# EAGLE board PCB-ARD-MMBOS (EAGLE 7.2.0)
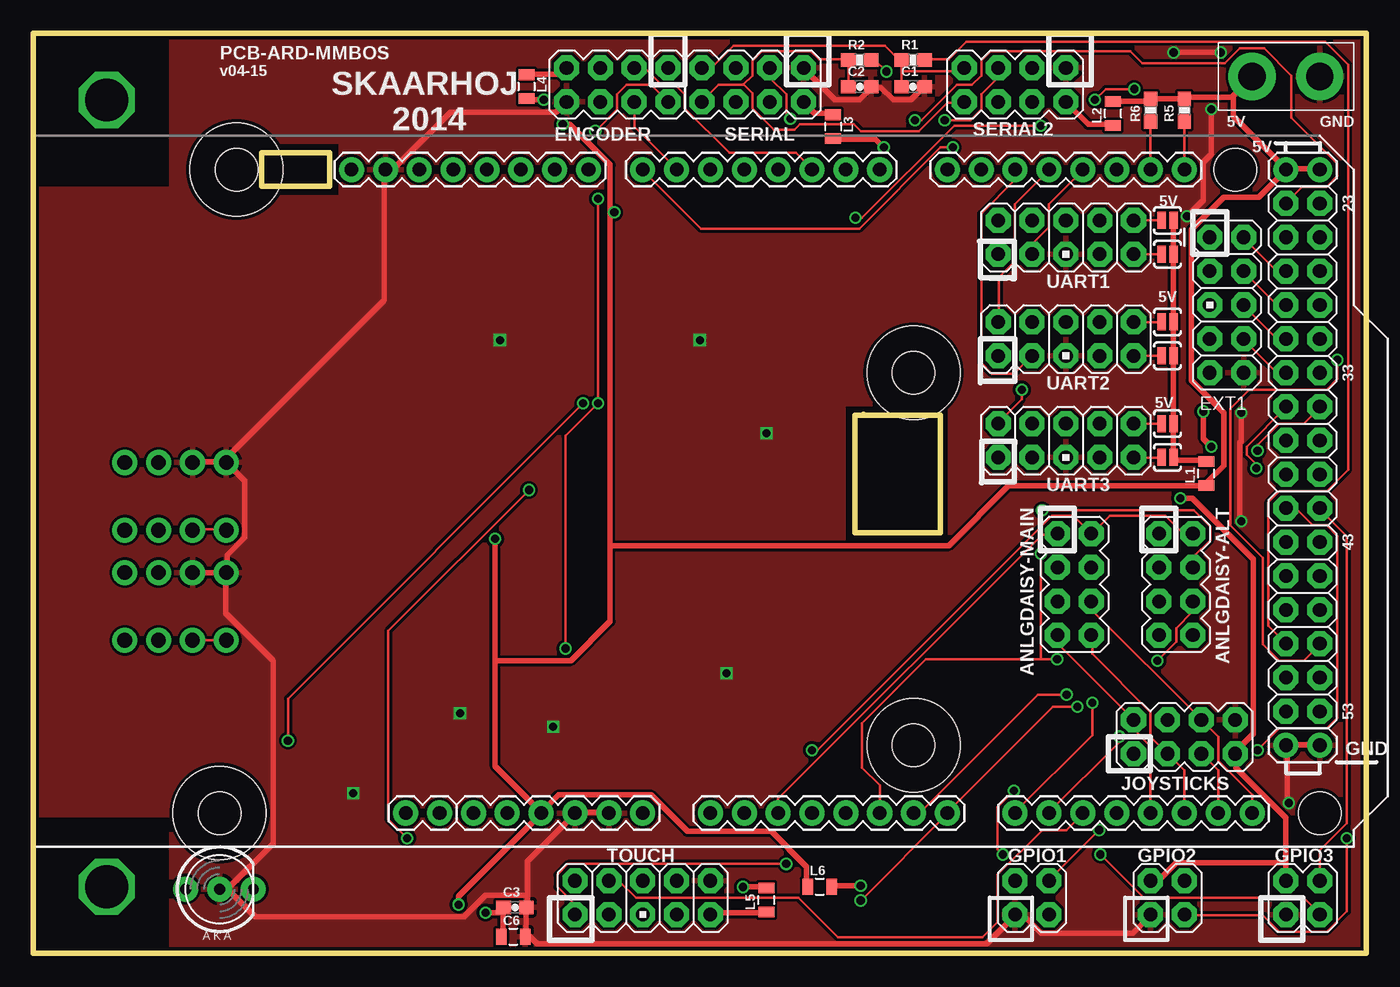
[diagram p0: board, top side]
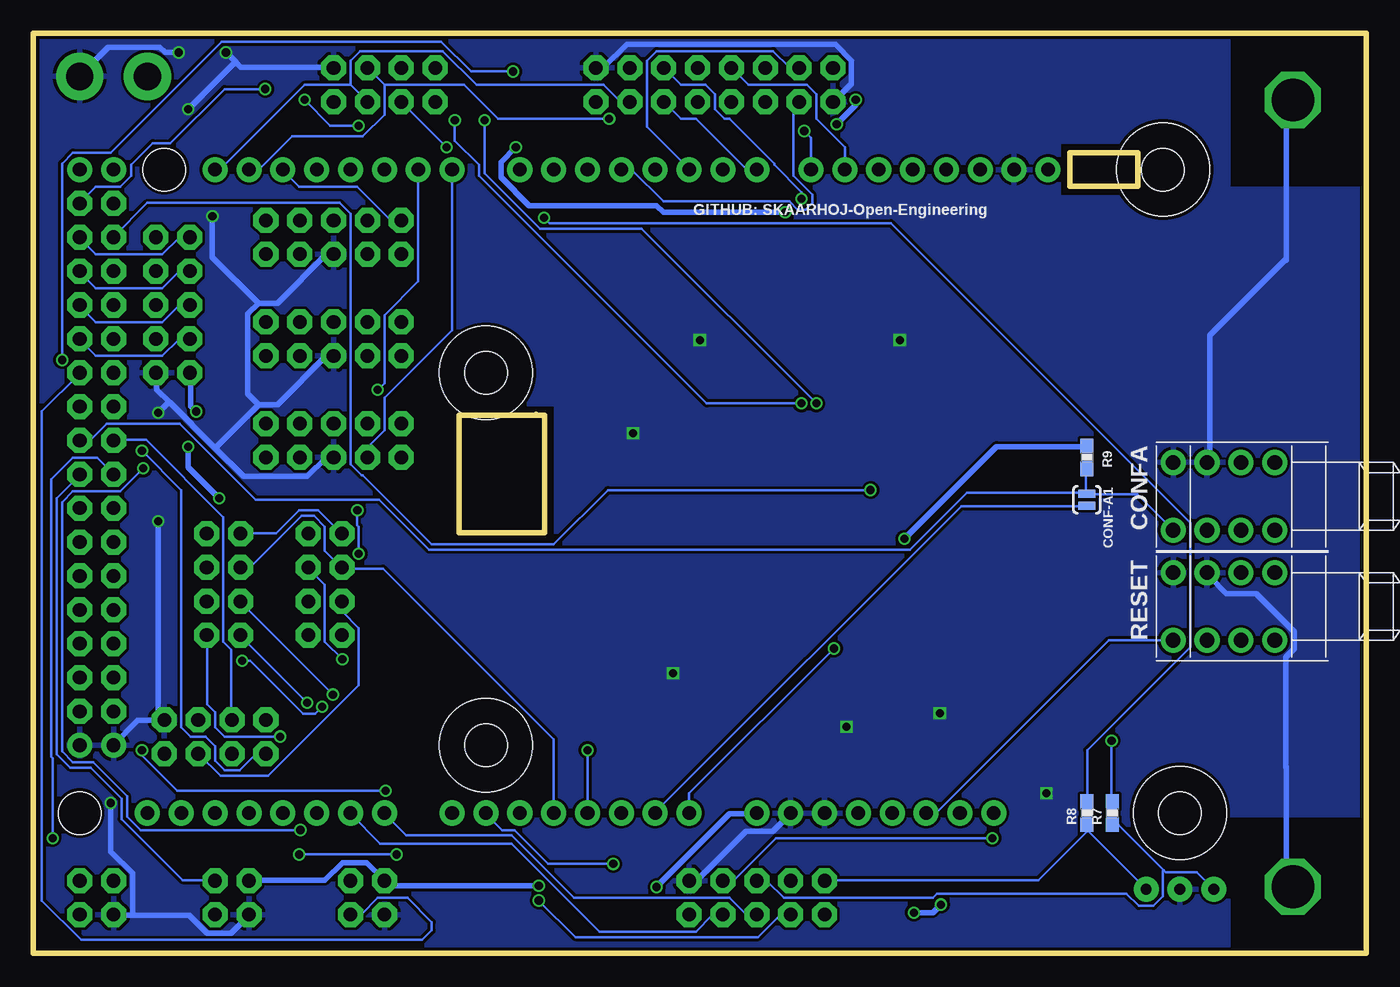
[diagram p1: board, bottom side, seen from below]

Size 100 x 69 mm. Coordinates in mm from the lower left corner, seen from the top.
Outline: 0,0 0,69 100,69 100,0 0,0
Copper layers (1*16): Top 0.035mm / dielectric 1.5mm / Bottom 0.035mm
Design rules "Fusion_eagle_rule_v1.1": minimum track width 6mil, minimum drill 12mil, track to track 6mil, track to pad 6mil, pad to pad 6mil, via to via 6mil, smd to smd 0mil, copper to edge 10mil, drill to drill 10mil, minimum pad ring 10mil, minimum via ring 6mil, stop-mask expansion 2mil, vias tented up to drill 100mil, thermal gap 10mil
Net classes: 0 default: width 0.203 mm, drill 0.61 mm, clearance 0.203 mm; 1 Power: width 0.406 mm, drill 0.61 mm, clearance 0.203 mm; 2 RELAY LINES: width 0.305 mm, clearance 0.203 mm; 3 INput lines: clearance 0.203 mm
Holes 7 mm at 13.97,10.53 15.24,58.78 66.04,43.55 66.04,15.61
tRestrict: area 0,0 to 10.2,10.2; area 0,57.5 to 10.2,68.9; area 61,30.8 to 68.6,41; area 16.5,56.9 to 22.9,60.7
bRestrict: area 0,57.5 to 10.2,68.9; area 0,0 to 10.2,10.2; area 61,30.8 to 68.6,41; area 16.5,56.9 to 22.9,60.7
Milling: 10 lines

## Footprints (pad centres in the part's own frame; a part is rotated, then mirrored left to right if it is on the bottom)
2X4 = drill 1.016 pad 1.88 octagon: 1 -3.81,-1.27; 2 -3.81,1.27; 3 -1.27,-1.27; 4 -1.27,1.27; 5 1.27,-1.27; 6 1.27,1.27; 7 3.81,-1.27; 8 3.81,1.27
0603-CAP = smd 1.1 x 1: 1 -0.85,0; 2 0.85,0
0805 = smd 0.8 x 1.2: 1 -0.9,0; 2 0.9,0
PUSHBUTTON = drill 1.1 pad 1.88: 1 2.54,2.54; 2 2.54,-2.54; 3 -2.54,2.54; 4 -2.54,-2.54
SJ_2S-NO = smd 0.635 x 1.27: 1 -0.45,0; 2 0.45,0
AVR_ICSP = drill 1.016 pad 1.88 octagon: 1 -1.27,5.08; 2 1.27,5.08; 3 -1.27,2.54; 4 1.27,2.54; 5 -1.27,0; 6 1.27,0; 7 -1.27,-2.54; 8 1.27,-2.54; 9 -1.27,-5.08; 10 1.27,-5.08
2X2 = drill 1.016 pad 1.88 octagon: 1 -3.81,-1.27; 2 -3.81,1.27; 3 -1.27,-1.27; 4 -1.27,1.27
1X02 = drill 1.016 pad 1.88: 1 0,0; 2 2.54,0
1X02_XTRA_BIG = drill 2.057 pad 3.556: 1 -2.54,0; 2 2.54,0
0603-RES = smd 1.1 x 1: 1 -0.85,0; 2 0.85,0
ARDUINO_MEGA = drill 1.016 pad 1.88: 0 63.5,50.8; 1 60.96,50.8; 2 58.42,50.8; 3 55.88,50.8; 3.3V 35.56,2.54; 4 53.34,50.8; 5 50.8,50.8; 5V@0 38.1,2.54; 5V@1 93.98,50.8; 5V@2 96.52,50.8; 6 48.26,50.8; 7 45.72,50.8; 8 41.656,50.8; 9 39.116,50.8; 10 36.576,50.8; 11 34.036,50.8; 12 31.496,50.8; 13 28.956,50.8; 14 68.58,50.8; 15 71.12,50.8; 16 73.66,50.8; 17 76.2,50.8; 18 78.74,50.8; 19 81.28,50.8; 20 83.82,50.8; 21 86.36,50.8; A0 50.8,2.54; A1 53.34,2.54; A2 55.88,2.54; A3 58.42,2.54; A4 60.96,2.54; A5 63.5,2.54; A6 66.04,2.54; A7 68.58,2.54; A8 73.66,2.54; A9 76.2,2.54; A10 78.74,2.54; A11 81.28,2.54; A12 83.82,2.54; A13 86.36,2.54; A14 88.9,2.54; A15 91.44,2.54; AREF 23.876,50.8; GND@0 40.64,2.54; GND@1 43.18,2.54; GND@2 93.98,7.62; GND@3 96.52,7.62; GND@4 26.416,50.8; RESET 33.02,2.54; VIN 45.72,2.54 | drill 1.016 pad 1.88 octagon: 22 93.98,48.26; 23 96.52,48.26; 24 93.98,45.72; 25 96.52,45.72; 26 93.98,43.18; 27 96.52,43.18; 28 93.98,40.64; 29 96.52,40.64; 30 93.98,38.1; 31 96.52,38.1; 32 93.98,35.56; 33 96.52,35.56; 34 93.98,33.02; 35 96.52,33.02; 36 93.98,30.48; 37 96.52,30.48; 38 93.98,27.94; 39 96.52,27.94; 40 93.98,25.4; 41 96.52,25.4; 42 93.98,22.86; 43 96.52,22.86; 44 93.98,20.32; 45 96.52,20.32; 46 93.98,17.78; 47 96.52,17.78; 48 93.98,15.24; 49 96.52,15.24; 50 93.98,12.7; 51 96.52,12.7; 52 93.98,10.16; 53 96.52,10.16 | hole 3.2: 15.24,50.8; 13.97,2.54; 66.04,35.56; 66.04,7.62; 90.17,50.8; 96.52,2.54
3.2MMPAD = drill 3.2 octagon: P$1 0,0
LED5MM-BICOLOR = drill 0.813 pad 1.88: A2 2.54,0; A3 -2.54,0; K1 0,0

## Placement (x,y rotation side)
ANLGDAISY-ALT  M04X2  [2X4]  85.72,27.67 270 top
ANLGDAISY-MAIN  M04X2  [2X4]  78.11,27.67 270 top
C1  220pF?  [0603-CAP]  66,65 0 top
C2  220pF?  [0603-CAP]  62,65 0 top
C3  100nF  [0603-CAP]  36.13,3.44 0 top
C6  22uF  [0805]  36,1.25 0 top
CONF  [PUSHBUTTON]  9.4,34.27 90 bottom
CONF-A1  SOLDERJUMPERNO  [SJ_2S-NO]  20.95,34.02 270 bottom
CONFA  [PUSHBUTTON]  11.94,34.27 90 bottom
ENCODER  M04X2  [2X4]  43.81,65.14 180 top
EXT1  M05X2PTH  [AVR_ICSP]  89.53,48.62 0 top
GPIO1  M02X2  [2X2]  77.47,4.17 0 top
GPIO2  M02X2  [2X2]  87.63,4.17 0 top
GPIO3  M02X2  [2X2]  97.79,4.17 0 top
JOYSTICKS  M04X2  [2X4]  86.36,16.24 0 top
JP1  [1X02]  27.94,10.53 0 top
JP8  [1X02_XTRA_BIG]  93.98,65.77 180 top
L1  [0805]  88,36 90 top
L2  [0805]  81,63 90 top
L3  [0805]  60,62 270 top
L4  [0805]  37,65 270 top
L5  [0805]  55,4 90 top
L6  [0805]  59,5 0 top
R1  ?  [0603-RES]  66,67 0 top
R2  ?  [0603-RES]  62,67 0 top
R5  1K5  [0603-RES]  86.36,63.23 90 top
R6  1K5  [0603-RES]  83.82,63.23 90 top
R7  270R  [0603-RES]  19.05,10.53 90 bottom
R8  270R  [0603-RES]  20.95,10.53 90 bottom
R9  10K  [0603-RES]  20.95,37.2 270 bottom
RESET  [PUSHBUTTON]  11.94,26.02 90 bottom
RESETA  [PUSHBUTTON]  9.4,26.02 90 bottom
SERIAL  M04X2  [2X4]  53.98,65.14 180 top
SERIAL2  M04X2  [2X4]  73.66,65.14 180 top
SJ1  SOLDERJUMPERNO  [SJ_2S-NO]  85.09,54.98 0 top
SJ2  SOLDERJUMPERNO  [SJ_2S-NO]  85.09,52.44 180 top
SJ3  SOLDERJUMPERNO  [SJ_2S-NO]  85.09,44.81 180 top
SJ4  SOLDERJUMPERNO  [SJ_2S-NO]  85.09,47.35 0 top
SJ5  SOLDERJUMPERNO  [SJ_2S-NO]  85.09,39.73 0 top
SJ6  SOLDERJUMPERNO  [SJ_2S-NO]  85.09,37.2 180 top
TOUCH  M05X2PTH  [AVR_ICSP]  45.72,4.17 90 top
U1  ARDUINO-MEGAFULL  [ARDUINO_MEGA]  0,7.99 0 top
U$1  GNDPAD  [3.2MMPAD]  5.5,64 0 top
U$15  LEDBICOLOR-AKA  [LED5MM-BICOLOR]  13.97,4.81 0 top
U$20  GNDPAD  [3.2MMPAD]  5.5,5 0 top
UART1  M05X2PTH  [AVR_ICSP]  77.47,53.7 90 top
UART2  M05X2PTH  [AVR_ICSP]  77.47,46.09 90 top
UART3  M05X2PTH  [AVR_ICSP]  77.47,38.47 90 top

## Library data of the parts
ANLGDAISY-ALT ANLGDAISY-MAIN C1-C3 C6 CONF-A1 ENCODER EXT1 JOYSTICKS JP1 JP8 L1-L6 R1 R2 R5-R9 SERIAL SERIAL2 SJ1-SJ6 TOUCH UART1-UART3 = SparkFun
CONF CONFA GPIO1-GPIO3 RESET RESETA U1 U$1 U$15 U$20 = SKAARHOJ

## Nets
5V [Power]: C3.1 C6.1 JP8.2 L1.1 L2.2 L3.2 L4.2 L6.1 R5.2 R6.2 R9.1 U1.5V@0 U1.5V@1 U1.5V@2
A0: SERIAL2.5 SERIAL.5 U1.A0
A1: CONF-A1.2 U1.A1
A2: ANLGDAISY-ALT.1 ANLGDAISY-MAIN.1 U1.A2
A3: ANLGDAISY-ALT.2 ANLGDAISY-MAIN.2 U1.A3
A4: ANLGDAISY-ALT.3 ANLGDAISY-MAIN.3 U1.A4
A5: ANLGDAISY-ALT.4 ANLGDAISY-MAIN.4 U1.A5
A6: ANLGDAISY-ALT.5 TOUCH.1 U1.A6
A7: ANLGDAISY-ALT.6 TOUCH.3 U1.A7
A8: ANLGDAISY-ALT.7 TOUCH.5 U1.A8
A9: ANLGDAISY-ALT.8 TOUCH.7 U1.A9
A10: TOUCH.4 U1.A10
A11: U1.A11
A12: ANLGDAISY-MAIN.7 JOYSTICKS.2 U1.A12
A13: ANLGDAISY-MAIN.8 JOYSTICKS.3 U1.A13
A14: ANLGDAISY-MAIN.5 JOYSTICKS.5 U1.A14
A15: ANLGDAISY-MAIN.6 JOYSTICKS.6 U1.A15
D2: ENCODER.3 U1.2
D3: ENCODER.6 U1.3
D4: U1.4
D5: ENCODER.5 U1.5
D6: ENCODER.4 U1.6
D7: SERIAL2.6 SERIAL.6 U1.7
D8: ENCODER.2 U1.8
D9: ENCODER.1 U1.9
D22: R7.2 U1.22
D23: R8.2 U1.23
D24: TOUCH.8 U1.24
D37: CONF-A1.1 CONF.3 CONFA.3 R9.2 U1.37
EXT1: EXT1.1 U1.25
EXT2: EXT1.2 U1.26
EXT3: EXT1.3 U1.27
EXT4: EXT1.4 U1.28
EXT5: EXT1.5 U1.29
EXT6: EXT1.6 U1.30
EXT7: EXT1.7 U1.31
EXT8: EXT1.8 U1.32
GND [Power]: C1.2 C2.2 C3.2 C6.2 CONF.1 CONFA.1 ENCODER.8 EXT1.10 GPIO1.1 GPIO2.1 GPIO3.1 JOYSTICKS.8 JP8.1 RESET.1 RESETA.1 SERIAL2.1 SERIAL.1 TOUCH.10 U1.GND@0 U1.GND@1 U1.GND@2 U1.GND@3 U1.GND@4 U$1.P$1 U$15.K1 U$20.P$1 UART1.5 UART2.5 UART3.5
GPIO1-1: GPIO1.3 U1.33
GPIO1-2: GPIO1.4 U1.34
GPIO2-1: GPIO2.3 U1.38
GPIO2-2: GPIO2.4 U1.39
GPIO3-1: GPIO3.3 U1.40
GPIO3-2: GPIO3.4 U1.41
I2C_SCL: R5.1 SERIAL2.4 SERIAL.4 U1.21
I2C_SDA: R6.1 SERIAL2.3 SERIAL.3 U1.20
MOSI: C2.1 R2.1 SERIAL2.8 SERIAL.8
N$1 [Power]: L2.1 SERIAL2.2
N$2 [Power]: L3.1 SERIAL.2
N$3: SJ6.2 UART3.9
N$4 [Power]: ENCODER.7 L4.1
N$5 [Power]: L5.1 TOUCH.9
N$6: SJ3.2 UART2.9
N$7 [Power]: EXT1.9 GPIO1.2 GPIO2.2 GPIO3.2 JOYSTICKS.7 L6.2
N$8 [Power]: L1.2 SJ1.2 SJ2.1 SJ3.1 SJ4.2 SJ5.2 SJ6.1
N$9: SJ2.2 UART1.9
N$10: SJ1.1 UART1.10
N$11: R1.2 U1.48
N$12: SJ4.1 UART2.10
N$13: SJ5.1 UART3.10
N$14: R2.2 U1.49
N$17: R8.1 TOUCH.2 U$15.A2
N$18: U1.53
N$19: U1.52
N$20: U1.51
N$21: U1.50
N$22: R7.1 TOUCH.6 U$15.A3
N$24: U1.47
N$25: U1.46
N$26: U1.45
N$27: U1.44
N$28: U1.43
N$29: U1.42
RESET: RESET.3 RESETA.3 U1.RESET
RXD1: U1.19 UART1.2
RXD2: U1.17 UART2.2
RXD3: U1.15 UART3.2
SCLK: C1.1 R1.1 SERIAL2.7 SERIAL.7
SW1: JOYSTICKS.1 U1.35
SW2: JOYSTICKS.4 U1.36
TXD1: U1.18 UART1.3
TXD2: U1.16 UART2.3
TXD3: U1.14 UART3.3
VIN [Power]: L5.2 U1.VIN

## Tracks (layer width: path | path; a pad name or v marks a point on that pad's centre or on a via)
5V  (via drill 0.61)
  Top 0.406: L2.2 81.08,63.91 83.72,63.91 R6.2 83.82,64.11 86.36,64.11 R5.2 86.46,64.21 89.92,64.21 | 89.92,64.21 91.44,65.73 JP8.2 | U1.5V@1 93.98,58.73 91.95,56.69 89.31,56.69 86.87,54.25 86.87,42.98 89.31,40.54 89.31,36.58 88.09,35.36 88.09,35.15 L1.1 87.88,35.05 73.15,35.05 68.68,30.58 43.28,30.58 | U1.5V@2 96.52,58.83 94.08,58.83 U1.5V@1 | 89.92,64.21 90.02,64.11 90.02,62.79 93.88,58.93 U1.5V@1 | C6.1 35.15,1.32 35.26,1.42 35.26,3.35 C3.1 35.15,3.05 v33.93,3.05 | 34.65,21.95 34.65,14.02 38.1,10.57 U1.5V@0 | 34.65,21.95 v34.65,31.09 | L6.1 58.01,5.08 58.01,6.5 55.37,9.14 49.07,9.14 46.33,11.89 39.42,11.89 38.2,10.67 U1.5V@0 | v38.3,64.01 37.08,64.01 L4.2 | v39.73,62.18 40.23,62.18 43.28,59.13 43.28,55.58 | 43.28,30.58 43.28,24.89 40.34,21.95 34.65,21.95 | 43.28,30.58 43.28,55.58 | v63.8,60.45 63.2,61.06 60.05,61.06 L3.2 | 43.28,55.58 v43.59,55.58 | v31.9,3.66 31.9,4.27 38,10.36 U1.5V@0
  Bottom 0.406: v34.65,31.09 27.74,38 21.03,38 R9.1 | v38.3,64.01 38.3,63.6 v39.73,62.18 | v63.8,60.45 64.92,59.33 64.92,58.22 62.79,56.08 53.24,56.08 52.73,55.58 v43.59,55.58 | v33.93,3.05 32.51,3.05 v31.9,3.66
A0  (via drill 0.61)
  Top 0.203: v39.93,22.86 39.93,38.81 v42.37,41.25 v42.37,56.59 | v68.38,62.48 70.31,62.48 71.12,63.3 71.12,64.41 72.34,65.63 72.34,66.34 SERIAL2.5
  Bottom 0.203: U1.A0 50.8,11.99 v39.93,22.86 | v42.37,56.59 42.37,57.1 44.4,59.13 44.4,59.23 47.75,62.59 48.16,62.59 48.87,63.3 48.87,64.41 49.58,65.13 51.41,65.13 52.63,66.34 SERIAL.5 | v68.38,62.48 68.38,60.96 66.55,59.13 66.55,58.32 49.48,41.25 v42.37,41.25
A1
  Bottom 0.203: CONF-A1.2 21.03,33.53 30.38,33.53 53.34,10.57 U1.A1
A2
  Top 0.203: U1.A2 55.88,11.58 75.69,31.39 76.81,31.39 ANLGDAISY-MAIN.1
  Bottom 0.203: ANLGDAISY-ALT.1 84.43,31.5 81.79,31.5 80.06,33.22 78.64,33.22 76.91,31.5 ANLGDAISY-MAIN.1
A3  (via drill 0.61)
  Top 0.203: v58.42,15.24 58.83,15.24 76.4,32.82 78.03,32.82 79.35,31.5 ANLGDAISY-MAIN.2 79.45,31.5 80.77,32.82 84.94,32.82 86.26,31.5 86.97,31.5 ANLGDAISY-ALT.2
  Bottom 0.203: v58.42,15.24 U1.A3
A4
  Bottom 0.203: U1.A4 60.96,16.05 73.76,28.85 76.81,28.85 ANLGDAISY-MAIN.3 76.91,28.96 78.13,30.18 78.13,32 78.94,32.82 79.86,32.82 83.72,28.96 84.43,28.96 ANLGDAISY-ALT.3
A5  (via drill 0.61)
  Top 0.203: U1.A5 63.5,12.6 62.18,13.92 62.18,17.27 66.95,22.05 75.59,22.05 | v76.81,22.05 75.59,22.05 | v75.69,33.22 87.07,33.22 88.29,32 88.29,30.99 87.07,29.77 87.07,28.96 ANLGDAISY-ALT.4 | 75.59,22.05 v75.59,29.97
  Bottom 0.203: v76.81,22.05 78.13,23.37 78.13,27.64 79.35,28.85 ANLGDAISY-MAIN.4 | v75.69,33.22 75.69,32.11 75.59,32 v75.59,29.97
A6  (via drill 0.61)
  Top 0.203: TOUCH.1 40.64,3.66 39.32,4.98 39.32,5.89 40.13,6.71 v56.49,6.71 | v77.52,19.41 75.39,19.41 66.55,10.57 66.04,10.57 U1.A6
  Bottom 0.203: v56.49,6.71 61.37,6.71 63.91,9.25 64.82,9.25 66.04,10.46 U1.A6 | v77.52,19.41 84.43,26.31 ANLGDAISY-ALT.5
A7  (via drill 0.61)
  Top 0.203: v62.08,3.96 68.58,10.46 U1.A7 68.58,10.57 76.5,18.49 v78.33,18.49 | v84.33,21.95 85.75,23.37 85.75,24.38 86.97,25.6 86.97,26.31 ANLGDAISY-ALT.6
  Bottom 0.203: v62.08,3.96 59.33,1.22 45.62,1.22 43.99,2.85 43.18,2.85 TOUCH.3 | v84.33,21.95 83.72,21.95 79.76,17.98 78.84,17.98 v78.33,18.49
A8  (via drill 0.61)
  Top 0.203: v79.45,18.8 79.45,16.36 73.66,10.57 U1.A8
  Bottom 0.203: TOUCH.5 45.72,2.95 46.53,2.95 47.75,4.17 59.44,4.17 64.11,8.84 72.03,8.84 73.66,10.46 U1.A8 | v79.45,18.8 84.43,23.77 ANLGDAISY-ALT.7
A9  (via drill 0.61)
  Top 0.203: v81.48,16.26 81.48,15.85 76.2,10.57 U1.A9
  Bottom 0.203: TOUCH.7 48.26,2.85 49.07,2.85 50.29,1.63 57.51,1.63 64.11,8.23 73.97,8.23 76.2,10.46 U1.A9 | v81.48,16.26 85.65,16.26 86.36,16.97 86.36,18.09 86.97,18.69 86.97,23.77 ANLGDAISY-ALT.8
A10
  Top 0.203: TOUCH.4 43.18,5.38 43.99,5.38 45.21,4.17 57.4,4.17 60.35,1.22 71.22,1.22 72.34,2.34 72.34,5.89 75.69,9.25 77.52,9.25 78.74,10.46 U1.A10
A12
  Top 0.203: U1.A12 83.82,15.54 82.6,16.76 82.6,17.48 JOYSTICKS.2 82.5,17.58 76.91,23.16 76.91,23.77 ANLGDAISY-MAIN.7
A13
  Top 0.203: U1.A13 86.36,13.72 85.14,14.94 JOYSTICKS.3 85.04,15.04 83.82,16.26 83.82,18.09 79.45,22.45 79.45,23.77 ANLGDAISY-MAIN.8
A14
  Top 0.203: U1.A14 88.9,13.72 87.68,14.94 JOYSTICKS.5
  Bottom 0.203: ANLGDAISY-MAIN.5 76.81,26.31 76.81,25.6 75.59,24.38 75.59,20.12 82.4,13.31 85.95,13.31 87.58,14.94 JOYSTICKS.5
A15
  Top 0.203: U1.A15 91.44,11.89 88.9,14.43 88.9,16.26 87.68,17.48 JOYSTICKS.6 87.58,17.58 79.45,25.7 79.45,26.31 ANLGDAISY-MAIN.6
D2
  Top 0.203: ENCODER.3 45.11,66.34 45.92,66.34 47.14,65.13 48.16,65.13 48.87,64.41 48.87,63.4 52.22,60.05 57.2,60.05 58.42,58.83 U1.2
D3
  Bottom 0.203: U1.3 55.88,58.73 55.07,58.73 52.73,56.39 43.28,56.39 42.67,55.78 42.06,55.78 41.55,56.29 41.55,56.9 42.98,58.32 42.98,63.4 42.57,63.8 ENCODER.6
D5
  Bottom 0.203: ENCODER.5 42.57,66.45 43.28,66.45 44.5,67.67 53.24,67.67 53.95,66.95 53.95,61.98 50.8,58.83 U1.5
D6
  Top 0.203: ENCODER.4 45.11,63.8 45.11,61.98 48.26,58.83 U1.6
D7  (via drill 0.61)
  Top 0.203: v68.99,60.45 68.07,60.45 61.98,54.36 50.09,54.36 45.72,58.73 U1.7
  Bottom 0.203: U1.7 45.72,58.83 46.53,58.83 50.29,62.59 51.41,62.59 52.63,63.8 SERIAL.6 | v68.99,60.45 72.34,63.8 SERIAL2.6
D8  (via drill 0.61)
  Top 0.203: v42.16,61.67 43.79,63.3 43.79,64.41 44.5,65.13 46.33,65.13 47.55,63.91 ENCODER.2
  Bottom 0.203: U1.8 41.66,61.16 v42.16,61.67
D9
  Bottom 0.203: U1.9 39.12,60.45 41.25,62.59 41.25,64.41 41.96,65.13 46.33,65.13 47.55,66.34 ENCODER.1
D22  (via drill 0.61)
  Top 0.203: v19.1,15.95 19.1,19.1 v41.25,41.25 | v66.14,62.48 66.65,62.48 69.29,65.13 70.41,65.13 71.12,65.84 71.12,66.95 71.83,67.67 82.3,67.67 83.21,66.75 89.41,66.75 90.53,67.87 92.35,67.87 94.39,65.84 94.39,62.69 97.84,59.23 97.84,58.32 97.03,57.51 95.2,57.51 93.98,56.29 U1.22
  Bottom 0.203: v19.1,15.95 19.1,11.38 R7.2 | v41.25,41.25 54.36,54.36 61.98,54.36 66.14,58.52 v66.14,62.48
D23  (via drill 0.61)
  Top 0.203: v61.67,55.17 62.18,55.17 69.09,62.08 v75.59,62.08 | v79.65,64.01 80.47,64.82 v82.6,64.82
  Bottom 0.203: v61.67,55.17 61.27,54.76 35.66,54.76 13.21,32.31 13.21,22.96 20.93,15.24 20.93,11.38 R8.2 | v75.59,62.08 77.72,62.08 v79.65,64.01 | v82.6,64.82 85.65,64.82 89.71,60.76 91.03,60.76 92.66,59.13 92.66,58.32 93.47,57.51 95.3,57.51 96.52,56.29 U1.23
D24  (via drill 0.61)
  Top 0.203: v28.04,8.64 26.62,10.06 26.62,24.18 v37.19,34.75
  Bottom 0.203: v28.04,8.64 44.3,8.64 47.45,5.49 48.26,5.49 TOUCH.8 | v37.19,34.75 56.9,34.75 60.96,30.68 70.1,30.68 75.29,35.87 75.39,35.87 76.2,36.68 76.2,55.47 77.01,56.29 91.44,56.29 93.98,53.75 U1.24
D37
  Top 0.203: CONF.3 11.99,31.8 14.43,31.8 CONFA.3
  Bottom 0.203: R9.2 21.03,36.27 21.03,34.54 CONF-A1.1 | CONF-A1.1 20.93,34.44 17.17,34.44 14.53,31.8 CONFA.3 | U1.37 96.52,38.51 95.71,38.51 94.49,39.73 89,39.73 83.31,34.04 74.07,34.04 70.31,30.28 34.24,30.28 29.97,34.54 21.13,34.54 CONF-A1.1
EXT1
  Bottom 0.203: EXT1.1 88.29,53.65 89.1,53.65 90.32,52.43 95.3,52.43 96.52,53.65 U1.25
EXT2
  Top 0.203: U1.26 93.98,51.21 93.27,51.21 90.83,53.65 EXT1.2
EXT3
  Bottom 0.203: EXT1.3 88.29,51.1 89.1,51.1 90.32,49.89 95.3,49.89 96.52,51.1 U1.27
EXT4
  Top 0.203: U1.28 93.98,48.67 93.27,48.67 90.83,51.1 EXT1.4
EXT5
  Bottom 0.203: EXT1.5 88.29,48.56 89.1,48.56 90.32,47.35 95.3,47.35 96.52,48.56 U1.29
EXT6
  Top 0.203: U1.30 93.98,46.13 93.27,46.13 90.83,48.56 EXT1.6
EXT7
  Bottom 0.203: EXT1.7 88.29,46.02 89.1,46.02 90.32,44.81 95.3,44.81 96.52,46.02 U1.31
EXT8
  Top 0.203: U1.32 93.98,43.59 93.27,43.59 90.83,46.02 EXT1.8
GND  (via drill 0.6, 0.61)
  Top 0.406: v89.1,67.56 v85.55,67.56 | v88.39,63.3 88.39,59.94 87.78,59.33 87.78,56.49 v86.56,55.27 | C1.2 66.75,64.92 65.84,64.01 64.52,64.01 63.6,64.92 62.89,64.92 C2.2 62.79,64.82 61.98,64.01 60.15,64.01 57.81,66.34 SERIAL.1 | ENCODER.8 39.93,63.8 39.22,63.09 31.29,63.09 27.03,58.83 26.42,58.83 U1.GND@4 26.31,58.62 26.31,48.97 14.43,37.08 CONFA.1 | U1.GND@3 96.52,15.65 93.98,15.65 U1.GND@2 94.08,15.44 94.08,11.38 v94.18,11.28 | GPIO2.1 83.82,2.85 82.5,1.52 75.59,1.52 74.27,2.85 73.66,2.85 GPIO1.1 73.56,2.74 71.53,0.71 37.8,0.71 37.19,1.32 C6.2 36.98,1.32 36.98,3.35 C3.2 37.08,3.56 37.08,4.37 | RESETA.1 11.99,28.55 14.43,28.55 RESET.1 | CONF.1 11.99,36.88 14.43,36.88 CONFA.1 | RESET.1 14.53,28.75 14.53,29.87 15.85,31.19 15.85,35.46 14.63,36.68 CONFA.1 | 37.08,4.37 37.08,6.91 40.64,10.46 U1.GND@0 40.74,10.57 43.18,10.57 U1.GND@1 | 37.08,4.37 33.93,4.37 32.31,2.74 16.66,2.74 14.63,4.78 14.02,4.78 U$15.K1 14.63,4.88 17.98,8.23 17.98,21.95 14.43,25.5 14.43,28.35 RESET.1 | v90.63,40.54 90.63,38.41 90.53,38.3 90.53,32.51 v90.63,32.41
  Bottom 0.406: v85.55,67.56 84.84,66.85 | 84.84,66.85 84.43,66.45 77.52,66.45 SERIAL2.1 | v89.1,67.56 90.12,67.56 90.53,67.97 94.39,67.97 96.52,65.84 JP8.1 | 89.81,41.35 90.73,42.27 90.73,43.48 EXT1.10 | 89.81,41.35 86.36,37.9 | 86.36,37.9 84.23,35.76 79.45,35.76 78.03,37.19 77.52,37.19 UART3.5 | 83.11,41.15 81.69,41.15 78.03,44.81 77.52,44.81 UART2.5 | 86.36,37.9 83.11,41.15 | 83.11,48.77 81.69,48.77 78.03,52.43 77.52,52.43 UART1.5 | 83.11,48.77 83.92,47.95 83.92,41.96 83.11,41.15 | v88.39,63.3 84.84,66.85 | v86.56,55.27 86.56,52.22 83.11,48.77 | SERIAL.1 57.71,66.45 57.2,66.45 55.47,68.17 39.83,68.17 38.61,66.95 38.61,65.23 39.93,63.91 ENCODER.8 | U1.GND@2 93.98,15.65 92.15,17.48 90.22,17.48 JOYSTICKS.8 90.63,17.58 v90.63,32.41 | 92.56,2.85 88.29,2.85 86.97,1.52 85.14,1.52 83.82,2.85 GPIO2.1 | 92.56,2.85 93.98,2.85 GPIO3.1 | v94.18,11.28 94.18,7.62 92.56,5.99 92.56,2.85 | TOUCH.10 50.8,5.49 50.19,5.49 46.53,9.14 44.5,9.14 43.18,10.46 U1.GND@1 | v90.63,40.54 89.81,41.35 | U$1.P$1 6,64 6,52.07 | 6,52.07 6,52 | U$20.P$1 6,5 6,13.97 | 6,13.97 6,14 | 6,13.97 6.03,13.97 6.03,22.23 5.4,22.86 5.4,24.13 8.26,26.99 10.48,26.99 11.75,28.26 RESETA.1 | CONF.1 11.75,36.83 11.75,46.35 6.03,52.07 6,52.07
  other vias: 35,46 50,46 55,39 39,17 32,18 24,12 52,21
  pour Top: 0,0 102,0 102,69 0,69
  pour Bottom: 0,0 102,0 102,69 0,69
GPIO1-1
  Bottom 0.203: GPIO1.3 76.2,2.95 75.39,2.95 74.17,4.17 71.93,4.17 70.1,2.34 70.1,1.73 70.81,1.02 96.42,1.02 99.36,3.96 99.36,40.64 96.52,43.48 U1.33
GPIO1-2  (via drill 0.61)
  Top 0.203: v79.96,9.25 76.2,5.49 GPIO1.4 | v91.75,36.37 91.75,36.68 91.03,37.39 91.03,38 93.98,40.95 U1.34
  Bottom 0.203: v79.96,9.25 91.95,9.25 92.96,10.26 92.96,11.79 95.5,14.33 97.03,14.33 97.84,15.14 97.84,33.83 97.03,34.65 93.47,34.65 v91.75,36.37
GPIO2-1  (via drill 0.61)
  Top 0.203: v98.55,8.64 98.55,3.15 97.03,1.63 93.47,1.63 92.25,2.85 86.36,2.85 GPIO2.3
  Bottom 0.203: v98.55,8.64 98.55,14.63 98.65,14.73 98.65,35.56 97.03,37.19 95.2,37.19 93.98,35.97 U1.38
GPIO2-2
  Bottom 0.203: GPIO2.4 86.36,5.49 88.8,5.49 93.37,10.06 93.37,11.58 95.71,13.92 97.23,13.92 98.25,14.94 98.25,34.14 96.52,35.87 U1.39
GPIO3-1  (via drill 0.61)
  Top 0.203: v91.85,15.24 93.47,16.87 97.03,16.87 97.84,17.68 97.84,31.29 97.03,32.11 96.01,32.11 94.79,33.33 93.98,33.33 U1.40 | v73.56,12.19 72.34,10.97 72.34,7.82 v72.75,7.42 | v80.06,7.42 83.31,4.17 95.3,4.17 96.52,2.95 GPIO3.3
  Bottom 0.203: v91.85,15.24 91.85,14.83 89.2,12.19 v73.56,12.19 | v80.06,7.42 v72.75,7.42
GPIO3-2
  Top 0.203: GPIO3.4 96.52,7.72 98.55,9.75 98.55,31.29 96.52,33.33 U1.41
I2C_SCL
  Top 0.203: U1.21 R5.1
  Bottom 0.203: 76.2,65.13 76.2,66.95 75.49,67.67 69.29,67.67 66.75,65.13 57.2,65.13 55.98,63.91 55.27,63.91 SERIAL.4 | 76.2,65.13 74.98,63.91 SERIAL2.4 | 76.2,65.13 79.65,65.13 85.95,58.83 86.36,58.83 U1.21
I2C_SDA  (via drill 0.61)
  Top 0.203: U1.20 R6.1 | v56.79,62.59 56.49,62.89 56.49,64.41 55.27,65.63 55.27,66.34 SERIAL.3
  Bottom 0.203: v56.79,62.59 65.13,62.59 67.67,65.13 73.66,65.13 | 73.66,65.13 74.88,66.34 SERIAL2.3 | 73.66,65.13 73.66,62.89 75.29,61.27 80.57,61.27 83.01,58.83 83.82,58.83 U1.20
MOSI
  Top 0.203: C2.1 61.16,65.02 61.16,66.95 R2.1 61.06,67.06 58.93,67.06 58.32,67.67 54.66,67.67 53.95,66.95 53.95,65.84 53.29,65.18 | 53.29,65.18 53.24,65.13 51.41,65.13 50.19,63.91 SERIAL.8 | 53.29,65.18 53.95,64.52 53.95,63.4 55.58,61.77 57.1,61.77 57.51,62.18 61.57,62.18 62.08,61.67 66.45,61.67 68.58,63.8 69.8,63.8 SERIAL2.8
N$1
  Top 0.406: L2.1 80.97,62.18 79.15,62.18 77.52,63.8 SERIAL2.2
N$2
  Top 0.406: L3.1 59.94,62.99 58.62,62.99 57.81,63.8 SERIAL.2
N$3
  Top 0.203: SJ6.2 84.63,37.19 82.6,37.19 UART3.9
N$4
  Top 0.406: L4.1 37.08,65.94 39.52,65.94 39.93,66.34 ENCODER.7
N$5
  Top 0.406: L5.1 54.97,3.05 50.9,3.05 50.8,2.95 TOUCH.9
N$6
  Top 0.203: SJ3.2 82.6,44.81 UART2.9
N$7  (via drill 0.61)
  Top 0.406: v62.08,5.08 59.94,5.08 L6.2 | GPIO3.2 93.98,6.81 | 93.98,6.81 93.98,10.16 90.22,13.92 90.22,14.94 JOYSTICKS.7 90.22,15.14 91.54,16.46 91.54,29.57 86.97,34.14 v86.06,34.14 | v87.78,40.64 87.78,38.61 v88.39,38 | 93.98,6.81 85.75,6.81 84.43,5.49 83.82,5.49 GPIO2.2
  Bottom 0.406: v62.08,5.08 73.36,5.08 73.66,5.38 GPIO1.2 73.76,5.59 74.98,6.81 76.81,6.81 78.13,5.49 83.82,5.49 GPIO2.2 | v87.78,40.64 88.19,41.05 88.19,43.48 EXT1.9 | v88.39,38 88.39,36.47 v86.06,34.14
N$8
  Top 0.406: SJ1.2 85.55,54.97 85.55,52.53 SJ2.1 85.55,52.32 85.55,47.55 SJ4.2 85.55,44.91 SJ3.1 85.55,44.7 85.55,39.93 SJ5.2 85.55,37.39 SJ6.1 85.55,37.19 85.75,36.98 87.99,36.98 L1.2
N$9
  Top 0.203: SJ2.2 84.63,52.43 82.6,52.43 UART1.9
N$10
  Top 0.203: SJ1.1 84.63,54.97 82.6,54.97 UART1.10
N$11
  Top 0.203: R1.2 66.85,67.06 68.68,67.06 70,68.38 96.93,68.38 98.65,66.65 98.65,36.27 97.03,34.65 93.47,34.65 92.66,33.83 92.66,24.59 93.98,23.27 U1.48
N$12
  Top 0.203: SJ4.1 82.6,47.35 UART2.10
N$13
  Top 0.203: SJ5.1 82.6,39.73 UART3.10
N$14  (via drill 0.61)
  Top 0.203: v64.01,66.14 63.2,66.95 62.89,66.95 R2.2 | v97.84,44.5 97.84,43.08 97.03,42.27 91.24,42.27 89.81,40.84 89.81,32.11 92.25,29.67 92.25,23.16 93.47,21.95 95.3,21.95 96.52,23.16 U1.49
  Bottom 0.203: v64.01,66.14 67.16,66.14 69.39,68.38 85.85,68.38 94.18,60.05 97.03,60.05 97.84,59.23 v97.84,44.5
N$17
  Bottom 0.203: U$15.A2 16.56,4.88 20.93,9.25 20.93,9.65 R8.1 20.93,9.14 24.59,5.49 40.64,5.49 TOUCH.2
N$22
  Bottom 0.203: 15.19,6.25 15.04,6.1 12.7,6.1 11.48,4.88 U$15.A3 | 15.19,6.25 18.59,9.65 19,9.65 R7.1 | TOUCH.6 45.72,5.38 44.91,5.38 43.69,4.17 32.51,4.17 32.21,4.47 17.98,4.47 17.07,3.56 15.95,3.56 15.24,4.27 15.24,6.2 15.19,6.25
RESET
  Top 0.203: RESETA.3 11.99,23.47 14.43,23.47 RESET.3
  Bottom 0.203: U1.RESET 33.02,10.57 32.21,10.57 19.3,23.47 14.53,23.47 RESET.3
RXD1
  Bottom 0.203: UART1.2 72.44,55.07 73.25,55.07 75.69,57.51 80.06,57.51 81.28,58.73 U1.19
RXD2
  Top 0.203: UART2.2 72.44,47.45 72.44,50.7 73.66,51.92 73.66,56.19 76.2,58.73 U1.17
RXD3  (via drill 0.61)
  Top 0.203: v74.17,42.27 74.17,41.55 72.44,39.83 UART3.2
  Bottom 0.203: U1.15 71.12,50.39 73.66,47.85 73.66,42.77 v74.17,42.27
SCLK
  Top 0.203: 65.13,66.14 65.13,66.95 R1.1 65.02,66.95 63.91,68.07 52.53,68.07 50.9,66.45 50.19,66.45 SERIAL.7 | 65.13,66.14 65.13,65.02 C1.1 | 65.13,66.14 69.6,66.14 69.8,66.34 SERIAL2.7
SW1  (via drill 0.61)
  Top 0.203: v91.85,37.69 91.85,38.1 93.47,39.73 95.3,39.73 96.52,40.95 U1.35
  Bottom 0.203: v91.85,37.69 88.9,34.75 88.9,16.97 88.19,16.26 87.07,16.26 86.36,15.54 86.36,14.43 85.65,13.72 84.53,13.72 83.31,14.94 82.6,14.94 JOYSTICKS.1
SW2
  Bottom 0.203: JOYSTICKS.4 85.14,17.58 85.14,22.76 85.75,23.37 85.75,32.72 91.54,38.51 93.98,38.51 U1.36
TXD1
  Top 0.203: UART1.3 74.98,52.53 74.98,53.24 76.2,54.46 76.2,56.19 78.74,58.73 U1.18
TXD2
  Top 0.203: U1.16 73.66,58.01 71.12,55.47 71.12,44.3 71.93,43.48 73.56,43.48 74.88,44.81 UART2.3
TXD3
  Bottom 0.203: U1.14 68.58,46.74 73.66,41.66 73.66,39.22 74.88,38 74.88,37.29 UART3.3
VIN  (via drill 0.61)
  Top 0.406: v53.24,4.98 54.97,4.98 L5.2
  Bottom 0.406: v53.24,4.98 47.75,10.46 45.72,10.46 U1.VIN

## Text on the board
_tsilk: PCB-ARD-MMBOS | v04-15 | SKAARHOJ / 2014 | 5V | GND | 5V | 23 | 5V | 33 | 5V | 43 | 53 | TOUCH
_bsilk: GITHUB: SKAARHOJ-Open-Engineering